# Altium PCB PCB1.PcbDoc
Units mm, origin at the board's own origin, x right, y up, seen from the top; angles counter-clockwise.
Board outline 30.23 x 51.43 mm, 2 copper layers (Top Layer, Bottom Layer); 35 components, 51 nets, 170 pads, 70 vias.
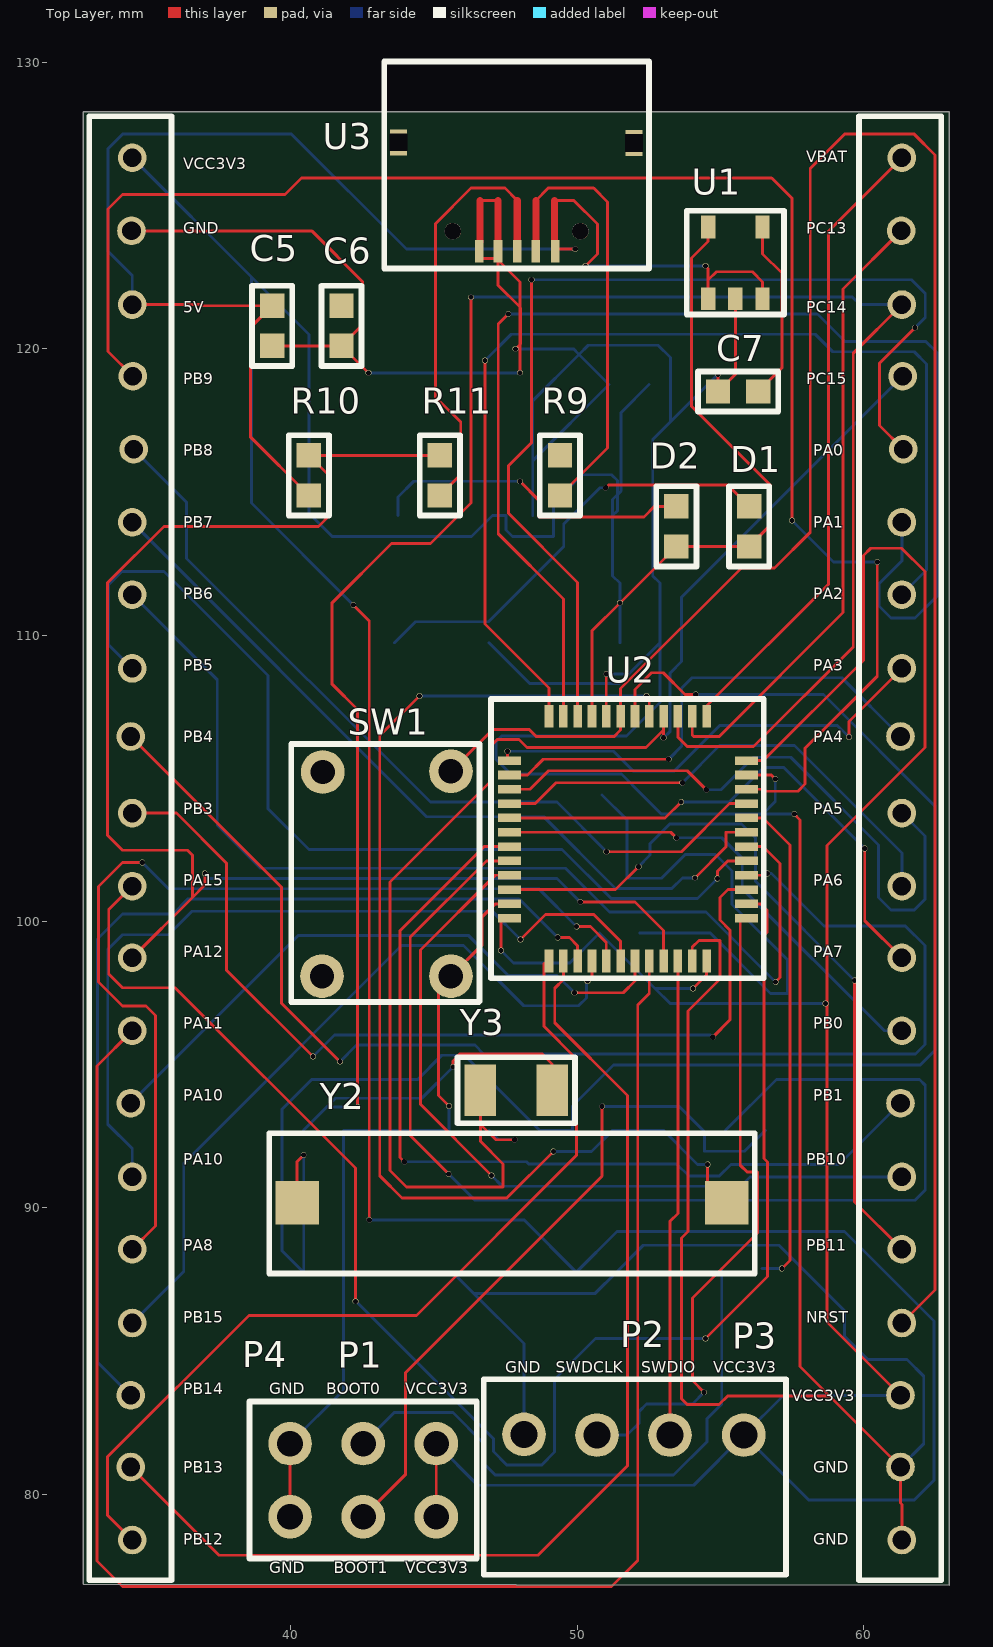
[diagram p0: Top Layer view]
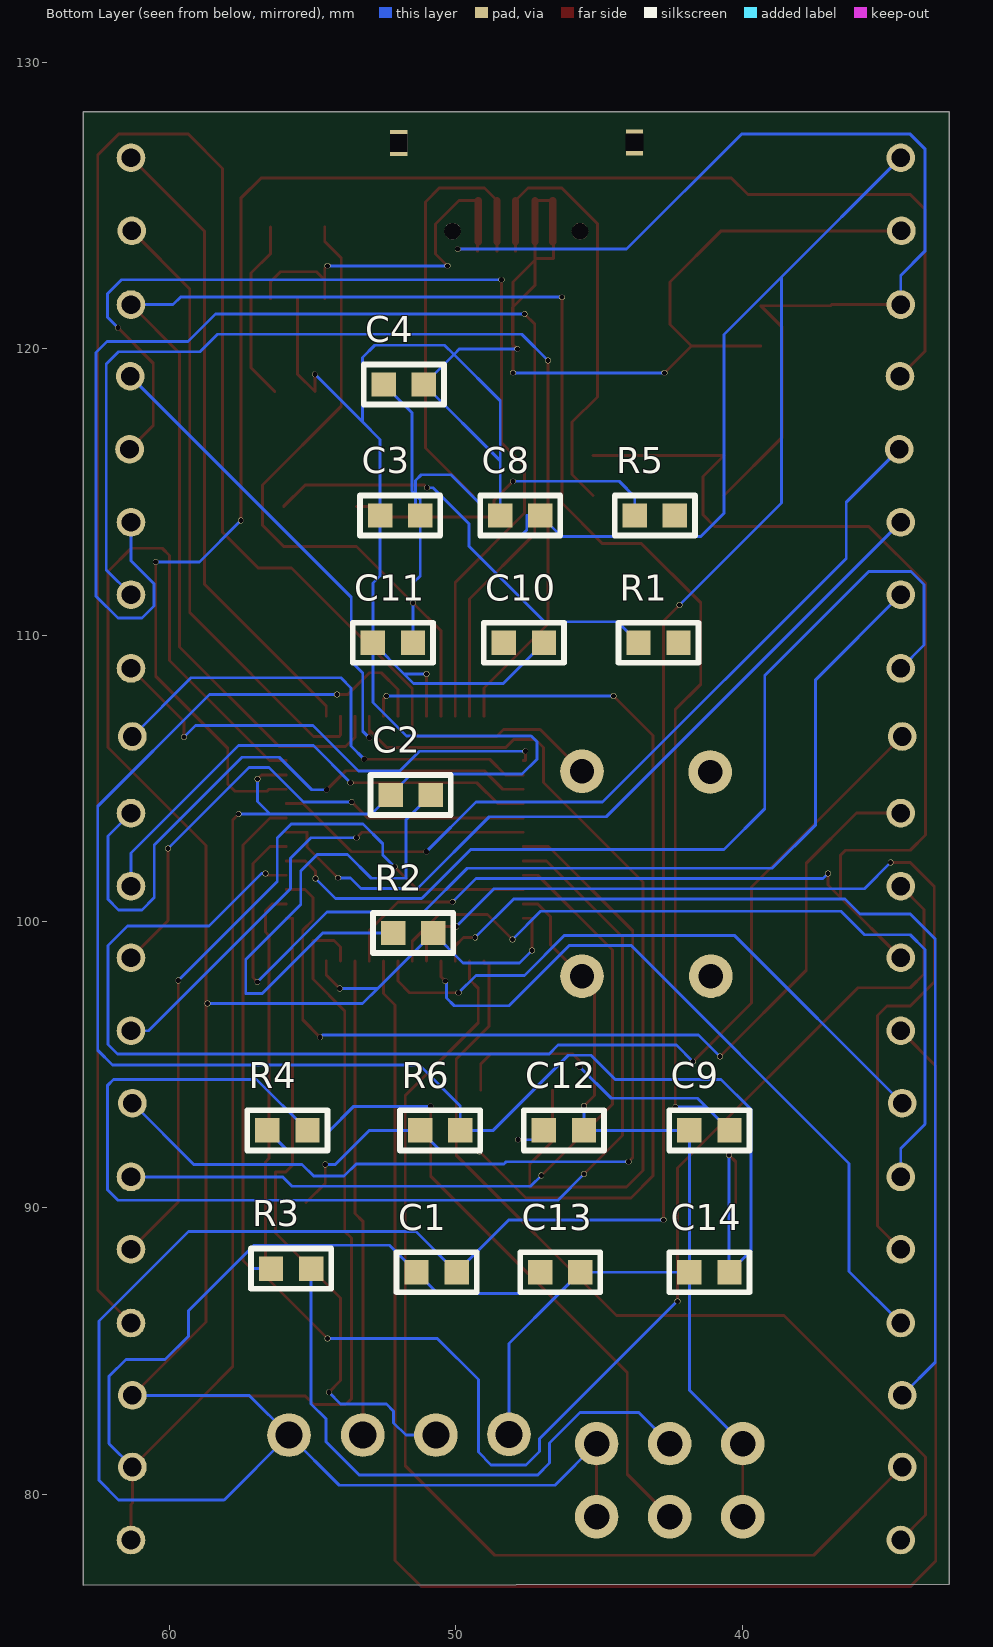
[diagram p1: Bottom Layer view, seen from below]
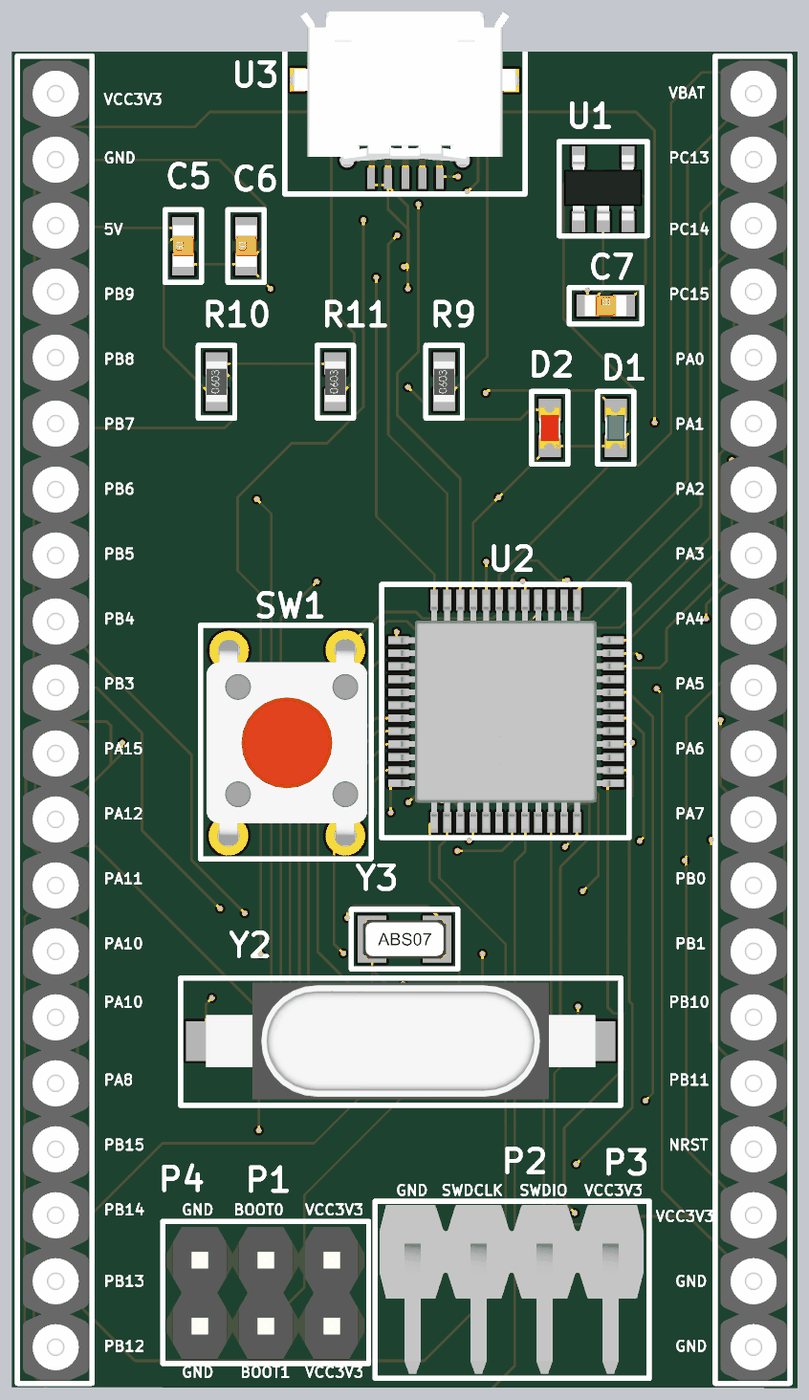
[diagram p2: 3D render of the assembled board from above, using the file's embedded part models]
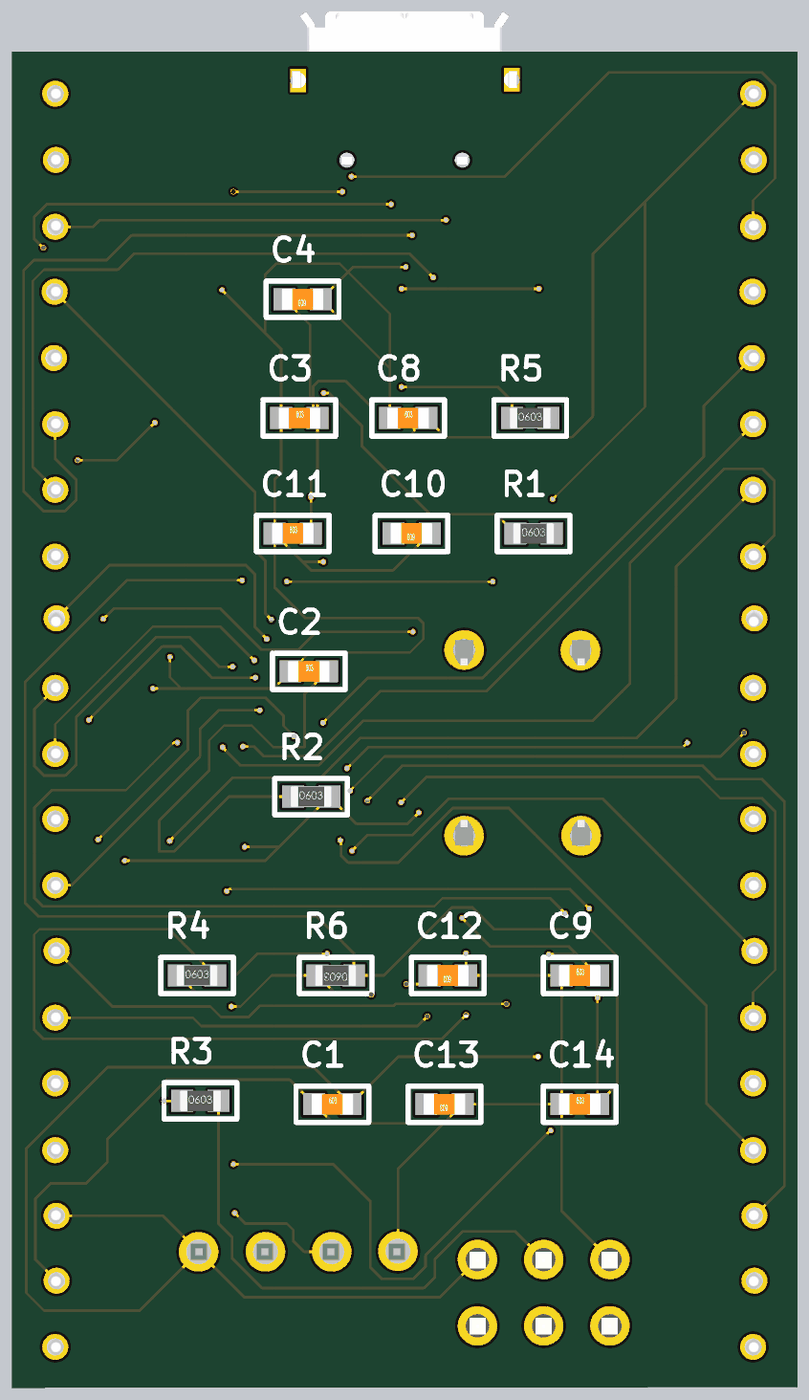
[diagram p3: 3D render of the assembled board from below, using the file's embedded part models]

## Layer stack, top to bottom
Top Solder: solder mask 0.0102, Solder Resist, Dk 3.5
Top Layer: signal copper 0.0356
Dielectric 1: dielectric 0.32, FR-4, Dk 4.8
Bottom Layer: signal copper 0.0356
Bottom Solder: solder mask 0.0102, Solder Resist, Dk 3.5

## Board outline
32.77,76.859 32.77,128.27 63,128.27 63,76.835

## Design rules (kind name [scope] priority, off if disabled: settings)
Clearance [All] p1: gap=0.254 ignorepadtopadclearanceinfootprint=FALSE except(0: Arc-Hole Track-Hole SMDPad-Hole THPad-Hole Via-Hole Fill-Hole Poly-Hole Region-Hole Text-Hole)
PolygonConnect [All] p1: connectstyle=Relief reliefconductorwidth=0.254 reliefentries=4 polygonreliefangle="90 Angle" airgapwidth=0.254
RoutingVias [All] p1: holewidth=0.18 width=0.2 viastyle="Through Hole" minholewidth=0.18 minwidth=0.2 maxholewidth=0.18 maxwidth=0.2
SolderMaskExpansion [All] p1: expansion=0.102
Width [All] p1: maxlimit=0.1 minlimit=0.1 preferedwidth=0.1 minimp=50.000000 maximp=50.000000 favimp=50.000000
30 further rules are at their usual default settings.

## Components (designator, comment, footprint, x,y, rotation, side; value= is the part's Value field where it differs from the comment)
C1 "104" CH0603C 50.673,87.757 r180 bottom
C2 "105" CH0603C 51.577,104.417 r180 bottom
C3 "104" CH0603C 51.943,114.173 r180 bottom
C4 "104" CH0603C 51.816,118.745 r0 bottom
C5 "105" CH0603C 39.358,120.793 r90 top
C6 "106" CH0603C 41.779,120.793 r90 top
C7 "223" CH0603C 55.622,118.499 r0 top
C8 "104" CH0603C 47.752,114.173 r180 bottom
C9 "20p" CH0603C 41.148,92.71 r180 bottom
C10 "104" CH0603C 47.625,109.728 r0 bottom
C11 "104" CH0603C 52.197,109.728 r180 bottom
C12 "20p" CH0603C 46.228,92.71 r0 bottom
C13 "20p" CH0603C 46.355,87.757 r0 bottom
C14 "20p" CH0603C 41.148,87.757 r180 bottom
D1 "LED" CH0603LB 56.007,113.792 r90 top
D2 "LED" CH0603LR 53.467,113.792 r90 top
P1 "Header 2x3" "Header 3X2" 42.545,80.518 r270 top
P2 "Header 4" "header 4" 52.197,80.772 r180 top
P3 "Header 20" "Header 20" 61.44,103.759 r0 top
P4 "Header 20.2" "Header 20" 34.572,103.759 r0 top
R1 "510" CH0603R 42.926,109.728 r180 bottom
R2 "10K" CH0603R 51.49,99.597 r180 bottom
R3 "100K" CH0603R 55.753,87.884 r180 bottom
R4 "100K" CH0603R 55.88,92.71 r180 bottom
R5 "510" CH0603R 43.053,114.173 r180 bottom
R6 "1M" CH0603R 50.546,92.71 r0 bottom
R9 "20" CH0603R 49.403,115.57 r90 top
R10 "4.7K" CH0603R 40.64,115.57 r90 top
R11 "20" CH0603R 45.212,115.57 r90 top
SW1 "Switch" Switch 43.348,101.668 r270 top
U1 "Regulator" MIC5205-3.3YM5-TR 55.626,123.063 r90 top
U2 "stm32" STM32F103C8T6 51.697,102.89 r270 top
U3 "USB micro" "USB MICRO" 47.891,128.397 r0 top
Y2 "8MHz" HC49 48.129,90.662 r0 top
Y3 "32.768K" "OSC: 3215" 47.879,94.107 r0 top

## Footprints (in the part's own frame and the unit in brackets; to place one, negate y for a bottom-side part, rotate by r counter-clockwise, add the part's x,y. Pads: shape width x height; smd on the part's side, far side on the other; paste and mask are expansions set on the pad)
CH0603C [mm] "Chip Capacitor, 2-Leads, Body 1,53x0,85mm, IPC Medium Density"
  rect 0.85x0.85 smd: 1(-0.7,0) 2(0.7,0)
  silkscreen extent -1.4,-0.7 1.4,0.7, body extent -0.8,-0.4 0.8,0.4, height 0.3
CH0603LB [mm] "Chip Capacitor, 2-Leads, Body 1,53x0,85mm, IPC Medium Density"
  rect 0.85x0.85 smd: 1(-0.7,0) 2(0.7,0)
  silkscreen extent -1.4,-0.7 1.4,0.7, body extent -0.8,-0.4 0.8,0.4, height 0.6
CH0603LR [mm] "Chip Capacitor, 2-Leads, Body 1,53x0,85mm, IPC Medium Density"
  rect 0.85x0.85 smd: 1(-0.7,0) 2(0.7,0)
  silkscreen extent -1.4,-0.7 1.4,0.7, body extent -0.8,-0.4 0.8,0.4, height 0.6
CH0603R [mm]
  rect 0.85x0.85 smd: 1(-0.7,0) 2(0.7,0)
  silkscreen extent -1.4,-0.7 1.4,0.7, body extent -0.8,-0.4 0.8,0.4, height 0.44
HC49 [mil]
  rect 60x60 smd: 1(-311.02,-18.7) 2(279.53,-18.7)
  silkscreen extent -349,-116 318,77, body extent -311,-107 280,70, height 201
"Header 3X2" [mm]
  round 1.52 hole 0.9: 1(-1.255,2.54) 2(1.296,2.54) 3(-1.255,-0.01) 4(1.296,-0.01) 5(-1.255,-2.56) 6(1.296,-2.56)
  silkscreen extent -2.73,-3.97 2.75,3.95, body extent -2.51,-3.83 2.57,3.79, height 8.88
"header 4" [mil]
  round 60 hole 37.4: 1(-142.72,-51.18) 2(-41.34,-51.18) 3(59.06,-51.18) 4(159.45,-52.17)
  silkscreen extent -201,-128 215,141, body extent -192,-122 208,134, height 188
"Header 20" [mm]
  round 1 hole 0.65: 1(-0.1,22.9) 2(-0.125,20.35) 3(-0.1,17.775) 4(-0.075,15.275) 5(-0.05,12.725) 6(-0.1,10.175) 7(-0.1,7.65) 8(-0.1,5.075) 9(-0.15,2.7) 10(-0.1,0.025) 11(-0.1,-2.525) 12(-0.1,-5.025) 13(-0.1,-7.575) 14(-0.15,-10.1) 15(-0.1,-12.675) 16(-0.1,-15.2) 17(-0.1,-17.775) 18(-0.15,-20.3) 19(-0.15,-22.8) 20(-0.1,-25.35)
  silkscreen extent -1.6,-26.75 1.27,24.35, body extent -1.4,-26.63 1.14,24.17, height 8.6
MIC5205-3.3YM5-TR [mm]
  rect 0.8x0.5 smd: 1(-1.325,1.05) 2(-1.325,0.1) 3(-1.325,-0.85) 4(1.175,-0.85) 5(1.175,1.05)
  silkscreen extent -1.87,-1.6 1.75,1.8, body extent -1.27,-1.4 1.23,1.6, height 1.05
"OSC: 3215" [mm]
  rect 1.1x1.8 smd: 1(-1.25,0) 3(1.25,0)
  silkscreen extent -2.05,-1.15 2.05,1.15, body extent -1.61,-0.76 1.61,0.76, height 0.91
STM32F103C8T6 [mm]
  rect 0.8x0.3 smd: 1(-4.275,2.825) 2(-4.275,2.325) 3(-4.275,1.825) 4(-4.275,1.325) 5(-4.275,0.825) 6(-4.275,0.325) 7(-4.275,-0.175) 8(-4.275,-0.675) 9(-4.275,-1.175) 10(-4.275,-1.675) 11(-4.275,-2.175) 12(-4.275,-2.675) 25(4.275,-2.675) 26(4.275,-2.175) 27(4.275,-1.675) 28(4.275,-1.175) 29(4.275,-0.675) 30(4.275,-0.175) 31(4.275,0.325) 32(4.275,0.825) 33(4.275,1.325) 34(4.275,1.825) 35(4.275,2.325) 36(4.275,2.825)
  rect 0.3x0.8 smd: 13(-2.725,-4.05) 14(-2.225,-4.05) 15(-1.725,-4.05) 16(-1.225,-4.05) 17(-0.725,-4.05) 18(-0.225,-4.05) 19(0.275,-4.05) 20(0.775,-4.05) 21(1.275,-4.05) 22(1.775,-4.05) 23(2.275,-4.05) 24(2.775,-4.05) 37(2.775,4.225) 38(2.275,4.225) 39(1.775,4.225) 40(1.275,4.225) 41(0.775,4.225) 42(0.275,4.225) 43(-0.225,4.225) 44(-0.725,4.225) 45(-1.225,4.225) 46(-1.725,4.225) 47(-2.225,4.225) 48(-2.725,4.225)
  silkscreen extent -4.87,-4.7 4.88,4.83, body extent -4.47,-4.42 4.53,4.58, height 1.6
Switch [mil]
  round 60 hole 33.46: 1(-140.75,88.58) ""(-139.76,-87.6)
  round 60 hole 33.46 unplated: 2(140.75,88.58) ""(140.75,-88.58)
  silkscreen extent -178,-131 176,128, body extent -156,-122 156,122, height 287
"USB MICRO" [mm]
  rect 0.3x0.8 smd: 1(1.35,-5) 2(0.675,-5) 3(0.025,-5) 4(-0.65,-5) 5(-1.3,-5)
  rect 0.6x0.9 hole 0.6 square unplated: ""(-4.125,-1.2) ""(4.1,-1.225)
  round 0.58 hole 0.58 unplated: ""(-2.225,-4.3) ""(2.225,-4.3)
  Top Layer lines w0.25: -1.275,-4.675 -1.275,-3.225 ; -0.65,-4.675 -0.65,-3.225 ; 0.025,-4.675 0.025,-3.225 ; 0.675,-4.675 0.675,-3.225 ; 1.325,-4.675 1.325,-3.225
  silkscreen extent -4.62,-5.6 4.63,1.62, body extent -4.32,-4.47 4.33,1.43, height 2.82

## Part data
C1 C2 C3 C4 C5 C6 C7 C8 C9 C10 C11 C12 C13 C14: library part Capacitor
P4: library part "Header 20"
R1 R2 R3 R4 R5 R6 R9 R10 R11: library part Resistor
Y2 Y3: library part Oscillator

## Via types
v1: diameter 0.2, hole 0.18, Top Layer to Bottom Layer, 70 vias

## Nets (pads, with @x,y where several pads share a name; then routed paths per layer and width w, separated by ;. In a path a pad name is that pad's centre, name@x,y a point inside that pad or via, vN(x,y) a via of type N, cw(c..) or ccw(c..) an arc to the next point about the centre after c; other vN are vias at no path point)
5V: C5.2 P4.3 R10.1 U1.1 U1.3 U3.1 | length 49.3
  Top Layer w0.1: P4.3 36.881,121.534 36.922,121.493 C5.2 38.608,120.743 38.608,116.902 R10.1 ; U3.1@49.216,123.722 49.241,123.697 U3.1@49.241,123.469 ; 49.216,125.172 49.885,125.172 50.71,124.347 50.71,123.303 v1(50.292,122.885) ; U3.1 U3.1@49.241,123.469 ; v1(49.936,123.469) U3.1@49.241,123.469 ; v1(54.483,122.885) 54.576,122.792 54.576,122.394 ; U1.1 54.576,122.394 ; U1.3 56.476,122.326 56.12,122.682 54.864,122.682 54.576,122.394
  Bottom Layer w0.1: P4.3 34.472,122.555 33.63,123.397 33.63,126.975 34.138,127.483 40.03,127.483 44.044,123.469 v1(49.936,123.469) ; v1(50.292,122.885) v1(54.483,122.885)
BOOT0: R3.1 U2.44 | length 17.5
  Top Layer w0.1: U2.44 56.49,103.615 57.434,102.671 57.434,88.168 v1(57.15,87.884)
  Bottom Layer w0.1: R3.1 v1(57.15,87.884)
BOOT1: R4.2 U2.20 | length 42
  Top Layer w0.1: v1(45.525,91.186) 44.178,92.533 44.178,99.455 46.838,102.115 U2.20
  Bottom Layer w0.1: v1(45.525,91.186) 46.439,90.272 61.798,90.272 62.154,90.627 62.154,94.285 61.951,94.488 56.958,94.488 R4.2
GND: C1.1 C2.1 C3.1 C4.1 C5.1 C6.1 C7.1 C8.1 C9.1 C10.1 C11.1 C12.1 C13.1 C14.1 P1.5 P1.6 P2.4 P3.19 P3.20 P4.2 SW1.2 U1.2 U2.8 U2.23 U2.35 U2.47 U3.4 U3.5 | length 207.6
  Top Layer w0.1: P4.2 40.737,124.109 42.52,122.326 42.52,120.834 C6.1 ; C5.1 C6.1 ; P1.6 P1.5 ; v1(42.721,119.151) C6.1 ; v1(45.528,93.562) 45.161,93.929 45.161,98.093 SW1.2 46.692,99.187 46.692,100.165 47.142,100.615 U2.23 ; U3.5@46.616,123.722 46.591,123.697 U3.5 46.591,123.139 47.193,123.139 U3.4@47.241,123.091 ; 46.616,125.172 47.241,125.172 ; U3.4@47.241,123.722 U3.4 U3.4@47.241,123.091 ; v1(47.854,119.99) 48.006,120.142 ; v1(48.006,119.151) 48.006,120.142 ; U2.8 v1(51.022,108.636) ; U2.35 54.022,99.107 54.254,99.339 54.991,99.339 54.991,97.991 53.876,96.876 53.876,89.179 53.645,88.948 53.645,83.337 53.848,83.134 54.954,83.134 55.259,83.439 58.81,83.439 ; v1(54.922,119.101) C7.1 55.526,119.103 U1.2 ; U2.47 56.781,105.115 v1(56.921,104.974) ; v1(57.582,103.755) 57.788,103.548 57.788,84.461 58.81,83.439 ; P3.20 61.34,79.654 61.29,79.704 P3.19 58.81,83.439 ; U3.4@47.241,123.091 48.006,122.326 48.006,121.445 ; U3.4@47.241,123.091 47.241,122.21 48.006,121.445 ; 48.006,120.142 48.031,120.167 48.031,121.419 48.006,121.445 ; 48.006,120.142 48.006,121.445
  Bottom Layer w0.1: P1.5 41.848,83.636 C14.1 ; v1(42.721,119.151) v1(48.006,119.151) ; v1(45.528,93.562) C12.1 C9.1 C14.1 ; C10.1 48.347,108.306 51.475,108.306 51.805,108.636 ; v1(47.854,119.99) 49.871,119.99 50.069,119.792 ; P2.4 48.147,85.265 46.392,87.02 ; C8.1 48.452,116.081 ; v1(51.022,108.636) 51.805,108.636 ; v1(54.922,119.101) 53.264,117.442 ; v1(56.921,104.974) 56.921,104.187 56.49,103.755 ; v1(57.582,103.755) 56.49,103.755 ; P3.19 62.103,81.772 62.103,84.125 61.519,84.709 60.147,84.709 59.334,85.522 59.334,86.411 57.048,88.697 52.313,88.697 C1.1 50.636,87.02 46.392,87.02 ; C14.1 C13.1 46.392,87.02 ; 48.452,116.081 48.452,118.175 50.069,119.792 ; 48.452,116.081 C4.1 50.069,119.792 ; 50.069,119.792 50.394,120.117 52.832,120.117 53.264,119.685 53.264,117.442 ; 51.805,108.636 C11.1 ; C11.1 52.897,107.648 51.726,106.477 47.371,106.477 47.168,106.274 47.168,105.664 47.686,105.146 51.548,105.146 C2.1 52.939,103.755 56.49,103.755 ; C11.1 52.897,111.811 52.643,112.065 C3.1 52.643,116.822 53.264,117.442
NetC2_2: C2.2 R2.1 | length 18.6
  Bottom Layer w0.1: C2.2 51.74,103.554 51.74,101.508 52.954,101.508 53.78,102.334 54.838,102.334 55.414,101.758 55.414,100.59 57.336,98.668 57.336,97.488 56.757,97.488 54.648,99.597 R2.1
NetC7_2: C7.2 U1.4 | length 6.4
  Top Layer w0.1: C7.2 57.15,119.327 57.15,122.631 56.476,123.305 U1.4
NetD1_2: D1.2 R1.1 | length 15.4
  Top Layer w0.1: v1(51.003,115.138) 51.105,115.24 55.259,115.24 D1.2
  Bottom Layer w0.1: R1.1 44.363,110.465 46.91,110.465 49.535,113.09 49.535,113.873 50.8,115.138 v1(51.003,115.138)
NetD2_2: D2.2 R5.1 | length 11.6
  Top Layer w0.1: v1(48.006,115.367) 48.666,114.706 48.666,114.122 52.335,114.122 52.705,114.492 D2.2
  Bottom Layer w0.1: R5.1 43.753,114.822 44.298,115.367 v1(48.006,115.367)
NetP1_3: P1.3 R3.2 | length 20.5
  Bottom Layer w0.1: P1.3 43.617,82.855 45.669,82.855 46.727,81.797 46.727,81.092 47.142,80.677 53.372,80.677 54.534,81.839 54.534,82.643 55.053,83.162 R3.2
NetP1_4: P1.4 R4.1 | length 24.8
  Top Layer w0.1: P1.4 44.018,80.705 44.018,84.252 50.876,91.11 v1(50.876,93.548)
  Bottom Layer w0.1: v1(50.876,93.548) 53.562,93.548 54.451,92.659 54.451,91.981 55.851,91.981 R4.1
NetR9_1: R9.1 U3.2 | length 14.1
  Top Layer w0.1: U3.2 U3.2@48.566,123.722 ; 48.566,125.172 48.997,125.603 50.581,125.603 51.064,125.12 51.064,116.531 R9.1
NetR11_1: R11.1 U3.3 | length 14
  Top Layer w0.1: R11.1 45.941,115.599 45.941,117.432 45.06,118.313 45.06,124.358 46.304,125.603 47.485,125.603 47.916,125.172 ; U3.3 U3.3@47.916,123.722
OSCIN: R6.2 U2.5 Y2.2 | length 40.8
  Top Layer w0.1: v1(44.501,107.874) 43.116,106.489 43.116,91.123 43.891,90.348 47.549,90.348 v1(49.174,91.973) ; v1(52.426,107.874) 52.522,107.777 U2.5 ; v1(54.559,91.516) 54.559,90.857 Y2.2
  Bottom Layer w0.1: v1(44.501,107.874) v1(52.426,107.874) ; v1(49.174,91.973) 50.509,91.973 R6.2 53.014,92.71 54.208,91.516 v1(54.559,91.516)
OSCOUT: C14.2 R6.1 U2.6 Y2.1 | length 60.3
  Top Layer w0.1: Y2.1 40.229,91.613 v1(40.462,91.846) ; U2.6 52.019,107.419 52.019,108.1 52.603,108.684 53.012,108.684 53.772,107.925 v1(54.146,107.925)
  Bottom Layer w0.1: v1(40.462,91.846) 40.462,87.771 C14.2 39.7,88.505 39.7,93.447 40.742,94.488 44.439,94.488 45.281,95.33 46.076,95.33 48.696,92.71 R6.1 49.846,93.559 51.275,94.988 61.982,94.988 62.498,95.504 62.498,104.024 58.598,107.925 v1(54.146,107.925)
PA0: P3.5 U2.10 | length 37
  Top Layer w0.1: v1(48.41,122.403) 48.41,116.711 47.602,115.903 47.602,114.256 50.022,111.836 U2.10 ; P3.5 60.561,117.313 60.561,119.489 v1(61.798,120.726)
  Bottom Layer w0.1: v1(48.41,122.403) 61.671,122.403 62.154,121.92 62.154,121.082 v1(61.798,120.726)
PA1: P3.6 U2.11 | length 44.9
  Top Layer w0.1: v1(47.6,121.209) 47.248,120.857 47.248,113.534 49.522,111.26 U2.11
  Bottom Layer w0.1: v1(47.6,121.209) 58.395,121.209 59.354,120.249 62.173,120.249 62.56,119.863 62.56,111.354 61.798,110.592 60.96,110.592 60.536,111.016 60.536,111.789 61.34,112.593 P3.6
PA2: P3.7 U2.12 | length 38
  Top Layer w0.1: v1(46.787,119.583) 46.787,110.388 49.022,108.153 U2.12
  Bottom Layer w0.1: v1(46.787,119.583) 47.701,120.498 58.318,120.498 58.928,119.888 61.773,119.888 62.205,119.456 62.205,112.274 P3.7
PA3: P3.8 U2.13 | length 16.6
  Top Layer w0.1: v1(47.574,105.943) 47.574,105.615 U2.13 ; v1(59.491,106.44) 59.491,106.985 P3.8
  Bottom Layer w0.1: v1(47.574,105.943) 51.274,105.943 51.96,105.258 53.393,105.258 54.982,106.847 59.084,106.847 v1(59.491,106.44)
PA4: P3.9 U2.14 | length 17.1
  Top Layer w0.1: U2.14 48.27,105.115 48.819,105.664 v1(53.199,105.664)
  Bottom Layer w0.1: v1(53.199,105.664) 53.656,106.122 53.656,108.154 54.011,108.509 59.24,108.509 P3.9
PA5: P3.10 U2.15 | length 22.3
  Top Layer w0.1: U2.15 48.362,104.615 49.007,105.26 53.846,105.26 v1(54.508,104.597)
  Bottom Layer w0.1: v1(54.508,104.597) 55.028,104.597 56.163,105.732 57.463,105.732 60.529,102.666 60.529,100.837 60.96,100.406 61.773,100.406 62.144,100.777 62.144,102.98 P3.10
PA6: P3.11 U2.16 | length 17.2
  Top Layer w0.1: U2.16 48.54,104.115 49.268,104.843 v1(53.677,104.843)
  Bottom Layer w0.1: v1(53.677,104.843) 54.973,106.139 57.59,106.139 61.34,102.388 P3.11
PA7: P3.12 U2.17 | length 18.7
  Top Layer w0.1: U2.17 53.076,103.615 v1(53.635,104.174) ; v1(60.046,102.548) 60.046,100.028 P3.12
  Bottom Layer w0.1: v1(53.635,104.174) 55.313,104.174 56.517,105.378 57.216,105.378 v1(60.046,102.548)
PA8: P4.16 U2.29 | length 34.2
  Top Layer w0.1: P4.16 35.281,89.368 35.281,96.723 34.95,97.053 34.138,97.053 33.299,97.892 33.299,101.219 34.138,102.057 v1(34.823,102.057) ; v1(49.987,99.822) 50.47,99.822 51.022,99.27 U2.29
  Bottom Layer w0.1: v1(34.823,102.057) 35.738,101.143 48.666,101.143 v1(49.987,99.822)
PA9: P4.15 U2.30 | length 28.6
  Top Layer w0.1: v1(48.024,99.372) 48.901,100.249 50.583,100.249 51.522,99.31 U2.30
  Bottom Layer w0.1: P4.15 34.472,92.071 33.618,92.925 33.618,99.018 34.138,99.538 35.741,99.538 36.558,100.355 47.041,100.355 v1(48.024,99.372)
PA10: P4.14 U2.31 | length 21.7
  Top Layer w0.1: v1(49.911,97.511) 51.613,97.511 52.022,97.92 U2.31
  Bottom Layer w0.1: P4.14 40.28,99.517 46.203,99.517 47.6,98.12 49.301,98.12 v1(49.911,97.511)
PA11: P4.13 U2.32 | length 59.7
  Top Layer w0.1: P4.13 33.249,94.961 33.249,77.673 34.138,76.784 51.206,76.784 52.121,77.699 52.121,97.084 52.522,97.485 U2.32
PA12: P4.12 R10.2 R11.2 U2.33 | length 51.1
  Top Layer w0.1: P4.12 36.576,100.838 ; v1(37.008,101.676) 37.008,101.27 36.576,100.838 ; R11.2 R10.2 41.377,115.533 41.377,114.198 40.97,113.792 35.585,113.792 33.604,111.811 33.604,103.022 34.138,102.489 36.398,102.489 36.576,102.311 36.576,100.838 ; v1(50.112,100.686) 52.019,100.686 53.022,99.683 U2.33
  Bottom Layer w0.1: v1(37.008,101.676) 37.186,101.498 49.299,101.498 v1(50.112,100.686)
PA15: P4.11 U2.38 | length 54.4
  Top Layer w0.1: P4.11 33.655,100.417 33.655,98.171 34.138,97.688 35.967,97.688 42.266,91.39 v1(42.266,86.741) ; v1(54.483,85.446) 56.649,87.612 56.649,91.607 56.528,91.728 56.528,99.515 56.642,99.629 56.642,100.381 56.408,100.615 U2.38
  Bottom Layer w0.1: v1(42.266,86.741) 42.284,86.741 47.081,81.944 47.081,81.499 47.549,81.031 48.768,81.031 49.213,81.476 49.213,84.011 50.648,85.446 v1(54.483,85.446)
PB0: P3.13 U2.18 | length 17.2
  Top Layer w0.1: U2.18 53.274,103.115 v1(53.467,102.922)
  Bottom Layer w0.1: v1(53.467,102.922) 55.053,102.922 55.768,102.206 55.768,101.145 60.73,96.184 P3.13
PB1: P3.14 U2.19 | length 31.7
  Top Layer w0.1: v1(43.97,91.613) 43.824,91.759 43.824,99.677 46.762,102.615 U2.19
  Bottom Layer w0.1: v1(43.97,91.613) 48.241,91.613 48.315,91.539 53.477,91.539 53.904,91.112 54.963,91.112 55.37,91.519 59.15,91.519 P3.14
PB3: P4.10 U2.39 | length 32.6
  Top Layer w0.1: P4.10 36.018,103.784 37.77,102.032 37.77,98.298 v1(40.782,95.286) ; v1(54.737,95.961) 55.345,96.569 55.345,99.693 54.991,100.047 54.991,100.836 55.27,101.115 U2.39
  Bottom Layer w0.1: v1(40.782,95.286) 41.534,96.038 54.66,96.038 v1(54.737,95.961)
PB4: P4.9 U2.40 | length 46
  Top Layer w0.1: P4.9 39.678,101.203 39.678,97.152 v1(41.723,95.107) ; U2.40 56.581,101.615 v1(56.642,101.676)
  Bottom Layer w0.1: v1(41.723,95.107) 42.3,95.684 46.433,95.684 46.74,95.377 61.814,95.377 62.144,95.707 62.144,99.162 61.458,99.847 58.616,99.847 56.787,101.676 v1(56.642,101.676)
PB5: P4.8 U2.41 | length 33.9
  Top Layer w0.1: v1(54.898,101.498) 54.898,101.754 55.259,102.115 U2.41
  Bottom Layer w0.1: P4.8 33.655,109.651 33.655,111.76 34.112,112.217 35.585,112.217 39.218,108.585 39.218,103.937 40.64,102.514 49.479,102.514 51.193,100.8 54.2,100.8 v1(54.898,101.498)
PB6: P4.7 U2.42 | length 36.6
  Top Layer w0.1: U2.42 56.49,102.615 57.08,102.025 57.08,98.04 v1(56.932,97.892)
  Bottom Layer w0.1: P4.7 37.44,108.441 37.44,103.378 38.96,101.857 49.603,101.857 51.134,100.326 54.498,100.326 v1(56.932,97.892)
PB7: P4.6 U2.43 | length 27.9
  Top Layer w0.1: v1(54.115,101.524) 55.194,102.603 55.194,103.115 U2.43
  Bottom Layer w0.1: P4.6 44.749,103.657 48.837,103.657 51.34,101.154 53.308,101.154 53.677,101.524 v1(54.115,101.524)
PB8: P4.5 U2.45 | length 29.1
  Top Layer w0.1: v1(51.032,102.435) 53.645,102.435 55.325,104.115 U2.45
  Bottom Layer w0.1: P4.5 36.373,114.633 36.373,112.674 44.882,104.165 49.301,104.165 v1(51.032,102.435)
PB9: P4.4 U2.46 | length 56.6
  Top Layer w0.1: P4.4 33.63,119.901 33.63,124.866 34.138,125.374 39.802,125.374 40.386,125.959 56.794,125.959 57.506,125.247 v1(57.506,113.995) ; U2.46 56.523,104.615 56.591,104.546 57.709,104.546 57.963,104.8 57.963,106.045 60.477,108.56 v1(60.477,112.547)
  Bottom Layer w0.1: v1(57.506,113.995) 58.953,112.547 v1(60.477,112.547)
PB10: P3.15 U2.21 | length 27.7
  Top Layer w0.1: v1(47.015,91.135) 44.532,93.619 44.532,99.005 47.142,101.615 U2.21
  Bottom Layer w0.1: v1(47.015,91.135) 47.392,90.758 55.715,90.758 56.041,91.084 P3.15
PB11: P3.16 U2.22 | length 26.4
  Top Layer w0.1: U2.22 51.346,101.115 v1(52.144,101.912) ; v1(59.69,97.943) 59.69,90.209 P3.16
  Bottom Layer w0.1: v1(52.144,101.912) 52.55,102.319 52.55,102.713 53.238,103.401 55.747,103.401 56.236,102.912 56.236,101.397 v1(59.69,97.943)
PB12: P4.20 U2.25 | length 31.4
  Top Layer w0.1: P4.20 33.604,79.277 33.604,81.305 38.548,86.249 44.396,86.249 49.987,91.841 49.987,95.199 48.842,96.345 48.842,98.531 49.022,98.531 U2.25
PB13: P4.19 U2.26 | length 38.7
  Top Layer w0.1: P4.19 37.505,77.876 48.641,77.876 51.765,81.001 51.765,93.922 49.22,96.467 49.22,97.671 49.522,97.973 U2.26
PB14: P4.18 U2.27 | length 35
  Top Layer w0.1: v1(49.327,99.441) 49.733,99.441 50.022,99.152 U2.27
  Bottom Layer w0.1: P4.18 33.264,84.617 33.264,99.393 34.138,100.267 35.891,100.267 36.412,100.787 47.981,100.787 v1(49.327,99.441)
PB15: P4.17 U2.28 | length 25.9
  Top Layer w0.1: v1(50.368,97.917) 50.522,98.071 U2.28
  Bottom Layer w0.1: P4.17 36.271,87.783 36.271,91.555 43.876,99.159 46.04,99.159 48.14,97.059 50.056,97.059 50.33,97.333 50.33,97.879 v1(50.368,97.917)
PC13: P3.2 U2.2 | length 21.9
  Top Layer w0.1: U2.2 54.022,106.507 54.068,106.461 54.966,106.461 59.289,110.784 59.289,122.083 P3.2
PC14: C9.2 P3.3 U2.3 Y3.3 | length 79.7
  Top Layer w0.1: v1(42.342,93.523) 42.342,107.394 41.453,108.283 41.453,111.125 43.526,113.199 44.889,113.199 46.295,114.605 v1(46.295,121.793) ; v1(45.675,94.926) 45.675,95.135 45.923,95.383 48.767,95.383 49.129,95.021 Y3.3 ; U2.3 53.522,106.433 53.848,106.107 56.163,106.107 59.643,109.587 59.643,119.837 P3.3
  Bottom Layer w0.1: C9.2 41.261,93.523 ; v1(42.342,93.523) 41.261,93.523 ; v1(45.675,94.926) 44.577,93.828 41.566,93.828 41.261,93.523 ; v1(46.295,121.793) 59.614,121.793 59.873,121.534 P3.3
PC15: C12.2 P3.4 U2.4 Y3.1 | length 49.9
  Top Layer w0.1: Y3.1 46.629,92.918 ; v1(47.828,92.38) 47.168,92.38 46.629,92.918 ; v1(53.022,106.413) 53.022,106.68 ; U2.4 53.022,106.68 ; 46.629,92.918 46.629,92.329 47.419,91.539 47.419,90.731 44.044,90.731 43.47,91.305 43.47,101.382 46.939,104.851 46.939,106.07 47.216,106.347 47.979,106.347 48.256,106.07 52.412,106.07 53.022,106.68
  Bottom Layer w0.1: C12.2 47.258,92.38 v1(47.828,92.38) ; v1(53.022,106.413) 53.251,106.642 53.251,108.674 53.651,109.074 53.651,111.32 P3.4
RESET: P3.17 SW1.1 U2.7 | length 76.2
  Top Layer w0.1: SW1.1 47.056,106.701 48.333,106.701 48.583,106.451 51.293,106.451 51.522,106.68 U2.7 51.522,108.128 55.738,112.344 56.896,112.344 58.141,113.589 58.141,126.289 59.334,127.483 61.773,127.483 62.498,126.757 62.498,87.142 P3.17
SWCLK: P2.3 U2.37 | length 22.9
  Top Layer w0.1: v1(54.432,83.566) 54.026,83.972 54.026,86.852 56.295,89.121 56.295,91.253 55.94,91.253 55.699,91.494 55.699,100.115 U2.37
  Bottom Layer w0.1: P2.3 51.744,82.072 52.172,82.499 52.172,82.906 52.426,83.16 54.026,83.16 v1(54.432,83.566)
SWIO: P2.2 U2.34 | length 16.7
  Top Layer w0.1: P2.2 53.247,89.535 53.522,89.81 U2.34
VBAT: P3.1 U2.1 | length 22.3
  Top Layer w0.1: U2.1 54.522,107.521 58.776,111.774 58.776,124.095 P3.1
VCC3V3: C1.2 C3.2 C4.2 C8.2 C11.2 D1.1 D2.1 P1.1 P1.2 P2.1 P3.18 P4.1 R2.2 U1.5 U2.9 U2.24 U2.36 U2.48 | length 213.1
  Top Layer w0.1: v1(42.189,111.049) 42.748,110.49 v1(42.748,89.586) ; P1.2 P1.1 ; v1(47.346,98.984) 47.346,100.115 U2.24 ; U2.9 50.522,110.147 v1(51.497,111.122) D2.1 D1.1 56.744,113.829 56.744,115.24 54,117.983 54,123.165 54.576,123.74 U1.5 ; v1(54.051,97.663) 54.522,98.134 U2.36 ; U2.48 56.5,105.615 59.997,109.112 59.997,112.776 60.251,113.03 61.331,113.03 62.144,112.217 62.144,106.07 58.725,102.651 v1@58.725,97.134 ; v1(58.67,97.134) v1@58.725,97.134 ; P3.18 58.725,86.024 v1@58.725,97.134
  Bottom Layer w0.1: P4.1 38.633,122.498 ; v1(42.189,111.049) 38.633,114.605 38.633,122.498 ; v1(42.748,89.586) 48.144,89.586 C1.2 51.395,89.179 59.334,89.179 62.459,86.055 62.459,80.493 61.773,79.807 58.087,79.807 P2.1 ; P1.1 46.535,80.323 54.073,80.323 P2.1 ; v1(47.346,98.984) 47.777,98.552 49.745,98.552 R2.2 52.724,97.663 ; C11.2 v1(51.497,111.122) 51.497,111.811 51.243,112.065 C3.2 ; C4.2 51.532,117.761 51.532,115.021 51.41,114.899 ; v1(54.051,97.663) 52.724,97.663 ; v1(58.67,97.134) 53.253,97.134 52.724,97.663 ; P3.18 57.209,83.459 P2.1 ; 38.633,122.498 40.64,120.491 40.64,114.249 41.453,113.436 46.315,113.436 C8.2 47.523,114.173 47.523,113.665 47.752,113.436 49.181,113.436 49.181,114.605 50.172,115.595 51.206,115.595 51.41,115.392 51.41,114.899 ; C3.2 51.41,114.34 51.41,114.899 ; C3.2 51.243,114.732 51.41,114.899
pads on no net: C6.2 C10.2 C13.2 R1.2 R5.2 R9.2 SW1. U3.

## Silkscreen, mask and mechanical layers (free items; w line width, h text height)
Top Overlay:
  text "VBAT" at 58,126.5 h0.4
  text "VCC3V3" at 36.25,126.25 h0.4
  text "GND" at 36.25,124 h0.4
  text "PC13" at 58,124 h0.4
  text "5V" at 36.25,121.25 h0.4
  text "PC14" at 58,121.25 h0.4
  text "PB9" at 36.25,118.75 h0.4
  text "PC15" at 58,118.75 h0.4
  text "PB8" at 36.25,116.25 h0.4
  text "PA0" at 58.25,116.25 h0.4
  text "PB7" at 36.25,113.75 h0.4
  text "PA1" at 58.25,113.75 h0.4
  text "PB6" at 36.25,111.25 h0.4
  text "PA2" at 58.25,111.25 h0.4
  text "PB5" at 36.25,108.75 h0.4
  text "PA3" at 58.25,108.75 h0.4
  text "PB4" at 36.25,106.25 h0.4
  text "PA4" at 58.25,106.25 h0.4
  text "PB3" at 36.25,103.75 h0.4
  text "PA5" at 58.25,103.75 h0.4
  text "PA15" at 36.25,101.25 h0.4
  text "PA6" at 58.25,101.25 h0.4
  text "PA12" at 36.25,98.75 h0.4
  text "PA7" at 58.25,98.75 h0.4
  text "PA11" at 36.25,96.25 h0.4
  text "PB0" at 58.25,96.25 h0.4
  text "PA10" at 36.25,93.75 h0.4
  text "PB1" at 58.25,93.75 h0.4
  text "PA10" at 36.25,91.5 h0.4
  text "PB10" at 58,91.5 h0.4
  text "PA8" at 36.25,88.5 h0.4
  text "PB11" at 58,88.5 h0.4
  text "PB15" at 36.25,86 h0.4
  text "NRST" at 58,86 h0.4
  text "GND" at 47.5,84.25 h0.4
  text "SWDCLK" at 49.25,84.25 h0.4
  text "SWDIO" at 52.25,84.25 h0.4
  text "VCC3V3" at 54.75,84.25 h0.4
  text "PB14" at 36.25,83.5 h0.4
  text "GND" at 39.25,83.5 h0.4
  text "BOOT0" at 41.25,83.5 h0.4
  text "VCC3V3" at 44,83.5 h0.4
  text "VCC3V3" at 57.5,83.25 h0.4
  text "PB13" at 36.25,80.75 h0.4
  text "GND" at 58.25,80.75 h0.4
  text "PB12" at 36.25,78.25 h0.4
  text "GND" at 58.25,78.25 h0.4
  text "GND" at 39.25,77.25 h0.4
  text "BOOT1" at 41.5,77.25 h0.4
  text "VCC3V3" at 44,77.25 h0.4
Drill Drawing:
  lines w0.2: 32.77,114.384 32.794,114.209 ; 32.77,76.859 32.794,76.835 63,76.835 63,123.706 63,128.27 32.77,128.27 32.77,76.859